# Altium PCB Disch_PCB.PcbDoc
Units mm, origin at the board's own origin, x right, y up, seen from the top; angles counter-clockwise.
Board outline 63.88 x 35.37 mm, 2 copper layers (Top Layer, Bottom Layer); 22 components, 18 nets, 78 pads, 0 vias.
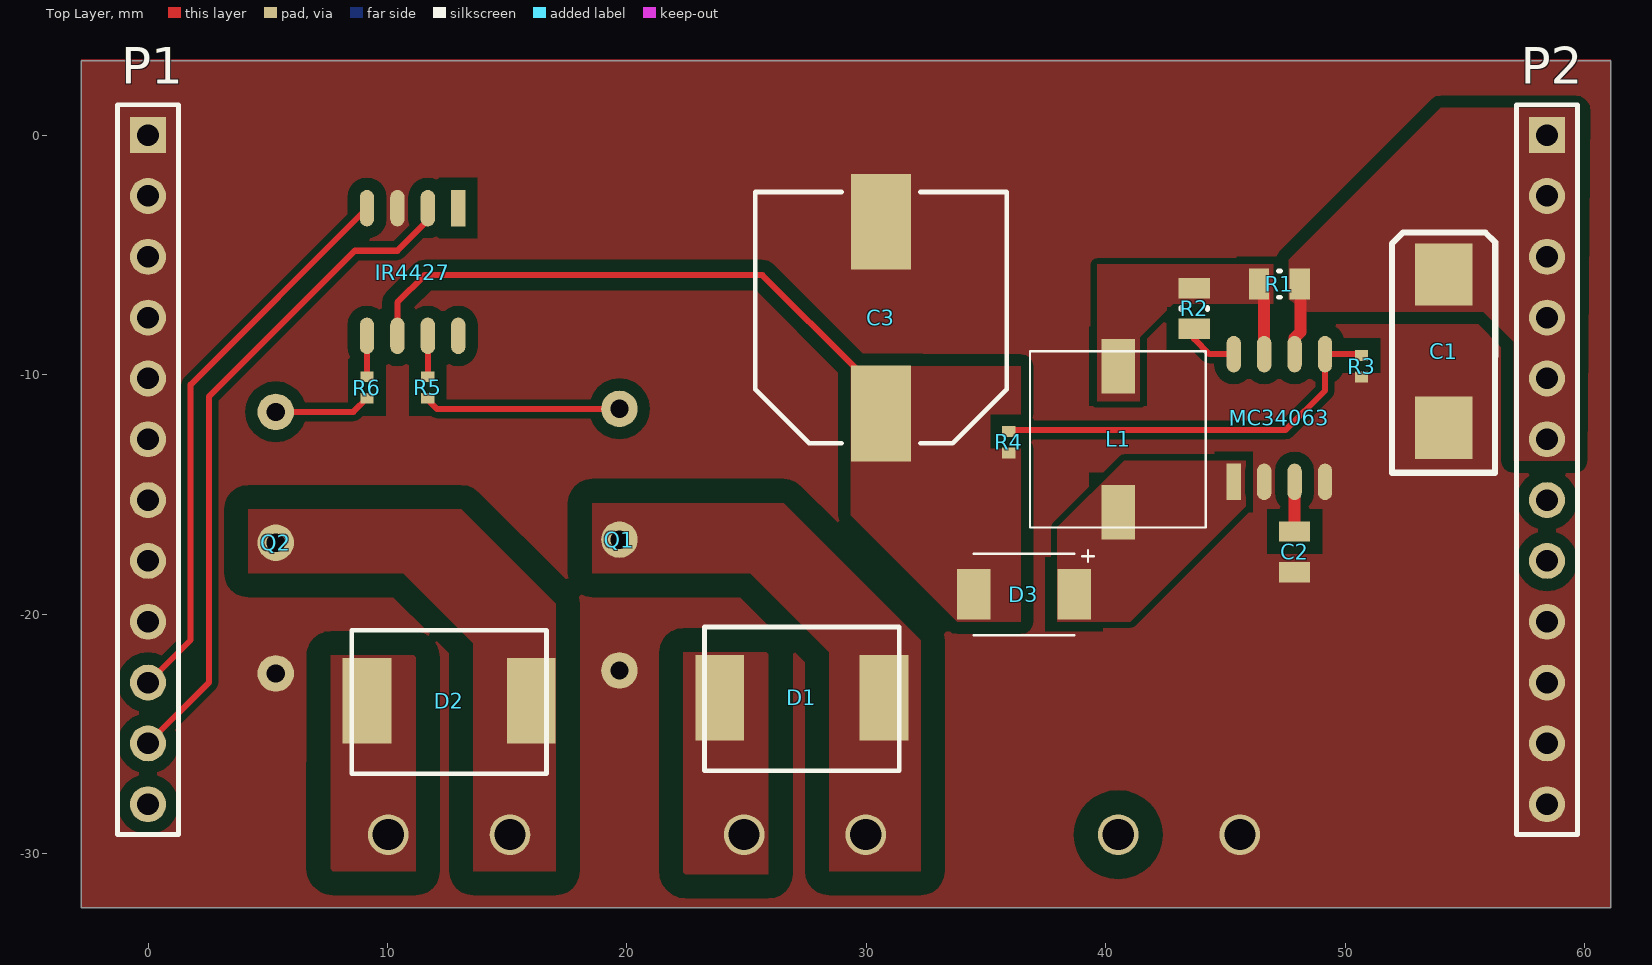
[diagram p0: Top Layer view]
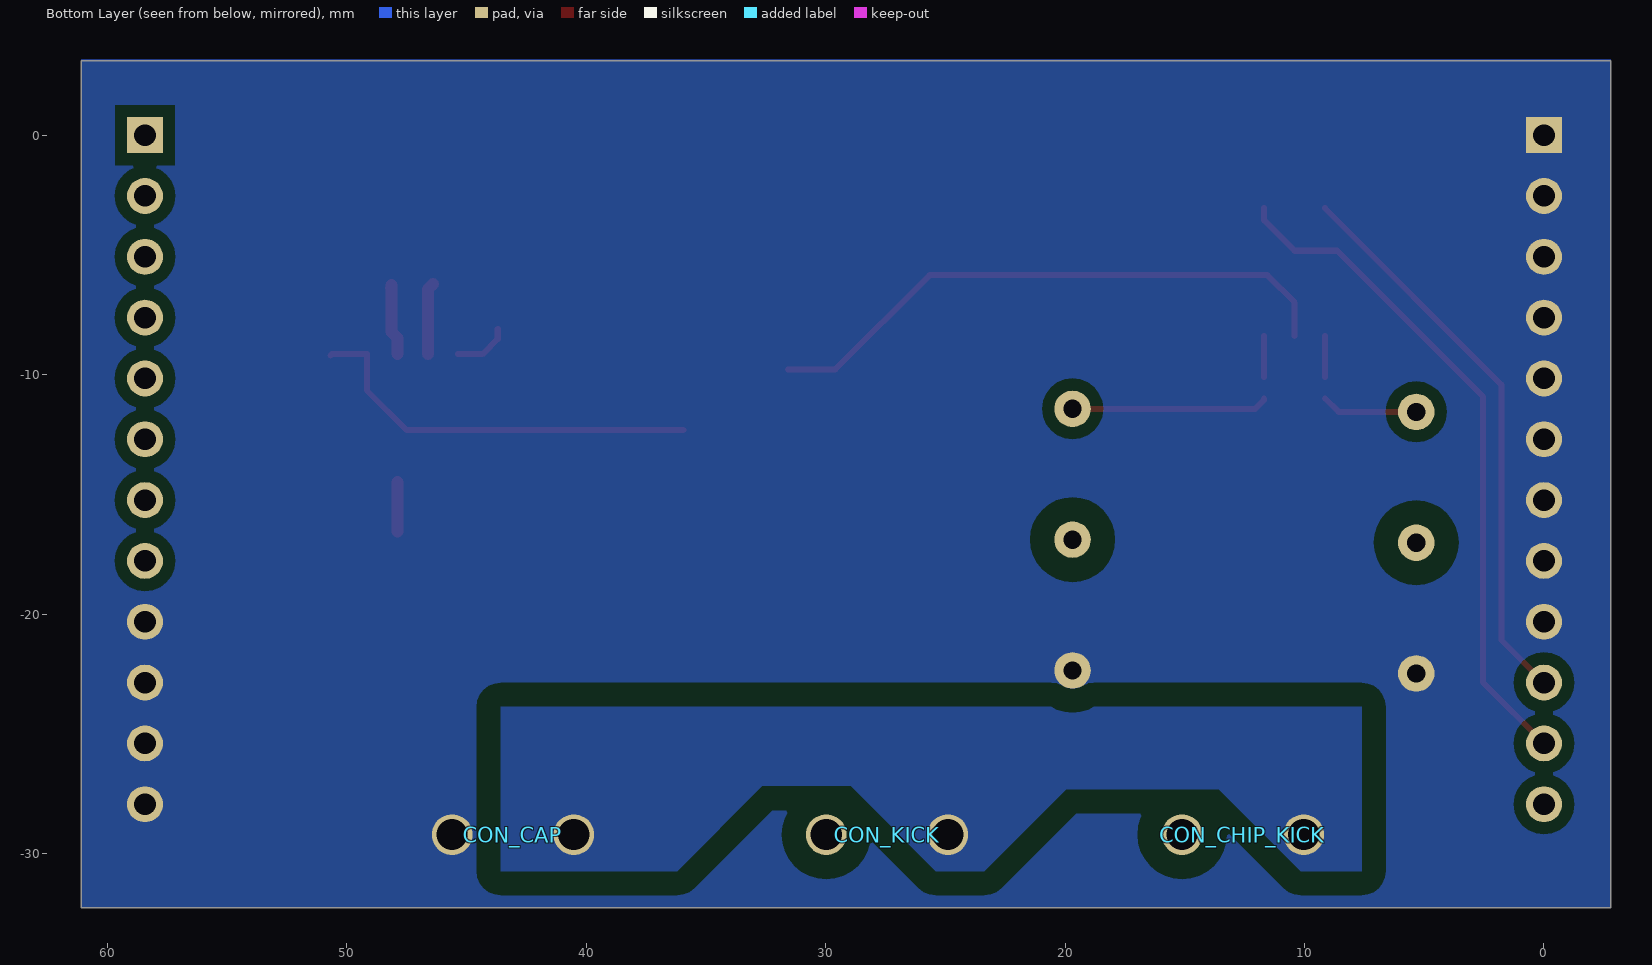
[diagram p1: Bottom Layer view, seen from below]
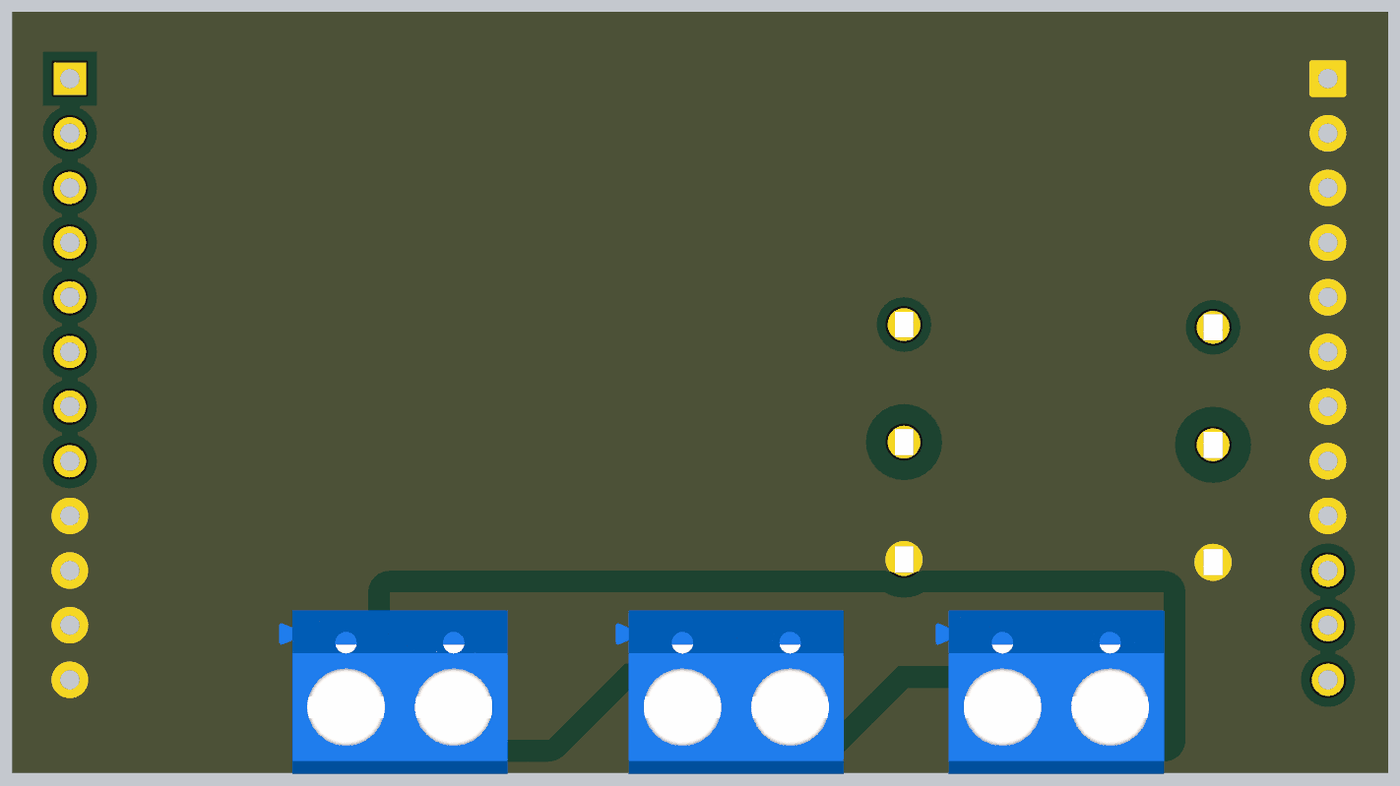
[diagram p2: 3D render of the assembled board from below, using the file's embedded part models]

## Layer stack, top to bottom
Top Solder: solder mask 0.0102, Solder Resist, Dk 3.5
Top Layer: signal copper 0.0356
Dielectric 1: dielectric 0.32, FR-4, Dk 4.8
Bottom Layer: signal copper 0.0356
Bottom Solder: solder mask 0.0102, Solder Resist, Dk 3.5

## Board outline
-2.794,-32.258 61.087,-32.258 61.087,3.107 -2.794,3.107

## Design rules (kind name [scope] priority, off if disabled: settings)
Clearance "Power Supplies" [InNetClass('PS')] p1: gap=0.5 ignorepadtopadclearanceinfootprint=TRUE
Clearance HV [InNetClass('HV')] p2: gap=1 ignorepadtopadclearanceinfootprint=TRUE
Clearance [All] p3: gap=0.254 ignorepadtopadclearanceinfootprint=TRUE except(0: Arc-Hole Track-Hole SMDPad-Hole THPad-Hole Via-Hole Fill-Hole Poly-Hole Region-Hole Text-Hole; 0.5: SMDPad-Poly THPad-Poly)
PlaneConnect [All] p1: planeconnectstyle=Direct reliefexpansion=0.508 reliefentries=4 reliefconductorwidth=0.254 reliefairgap=0.254
PolygonConnect [All] p1: connectstyle=Direct reliefconductorwidth=0.254 reliefentries=4 polygonreliefangle="90 Angle" airgapwidth=0.254
RoutingVias [All] p1: holewidth=0.711 width=1.27 viastyle="Through Hole" minholewidth=0.711 minwidth=1.27 maxholewidth=0.711 maxwidth=1.27
SolderMaskExpansion [All] p1: expansion=0.102
Width [All] p1: maxlimit=1 minlimit=0.254 preferedwidth=0.254
29 further rules are at their usual default settings.

## Classes and differential pairs
net class PS: VCC Vs
net class HV: Cap+ CHIP_KICK- KICK-

## Components (designator, comment, footprint, x,y, rotation, side; value= is the part's Value field where it differs from the comment)
C1 "100uF" 7343-CAPPOL 54.102,-9.017 r270 top
C2 "180pF" 0805-CAP 47.879,-17.399 r90 top
C3 "220uF" NIC-CAPA2-10X10_V 30.607,-7.62 r90 top
CON_CAP "OSTTA024163" "Term Block 2P" 43.053,-29.21 r180 bottom
CON_CHIP_KICK "OSTTA024163" "Term Block 2P" 12.573,-29.21 r180 bottom
CON_KICK "OSTTA024163" "Term Block 2P" 27.432,-29.21 r180 bottom
D1 "ES3J" Diode 27.305,-23.495 r0 top
D2 "ES3J" Diode 12.573,-23.622 r0 top
D3 "PMEG3050EP,115" PCBComponent 36.576,-19.177 r0 top
IR4427 "GATE DRIVER" IR4427 11.049,-5.715 r270 top
L1 "100uH" INDUCTOR 40.513,-12.7 r90 top
MC34063 "Switching Voltage Regulator" MC34063 45.339,-14.605 r90 top
P1 "Header 12" HDR1X12 0,0 r270 top
P2 "Header 12" HDR1X12 58.42,0 r270 top
Q1 "IRG4PC50FD" IRG4PC50FD 19.685,-16.891 r270 top
Q2 "IRG4PC50FD" IRG4PC50FD 5.334,-17.018 r270 top
R1 "1R" 0805-RES 47.244,-6.223 r180 top
R2 "160R" 0805-RES 43.688,-7.239 r90 top value=160
R3 "1K" 0402-RES-HD 50.673,-9.652 r90 top
R4 "11K1" 0402-RES-HD 35.941,-12.827 r90 top value=11k1
R5 "10R" 0402-RES-HD 11.684,-10.541 r270 top value=10
R6 "10R" 0402-RES-HD 9.144,-10.541 r270 top value=10

## Footprints (in the part's own frame and the unit in brackets; to place one, negate y for a bottom-side part, rotate by r counter-clockwise, add the part's x,y. Pads: shape width x height; smd on the part's side, far side on the other; paste and mask are expansions set on the pad)
0402-RES-HD [mm] "Chip Resistor, Body 1.0x0.5mm, IPC High Density"
  rect 0.45x0.55 smd: 1(-0.45,0) 2(0.45,0)
  body extent -0.52,-0.27 0.53,0.28, height 0.4
0805-CAP [mm] "Chip Resistor, Body 2.0x1.3mm, IPC High Density"
  rect 0.85x1.3 smd: 1(-0.85,0) 2(0.85,0)
  body extent -1.1,-0.67 1.1,0.68, height 0.7
0805-RES [mm] "Chip Resistor, Body 2.0x1.3mm, IPC High Density"
  rect 0.85x1.3 smd: 1(-0.85,0) 2(0.85,0)
  silkscreen extent -0.05,-0.55 0.05,0.55, body extent -1.1,-0.67 1.1,0.68, height 0.7
7343-CAPPOL [mm] "SMT Capacitor, 2 Leads, Body 7.3x4.3mm"
  rect 2.6x2.4 smd: 1(-3.202,0.007) 2(3.198,0.007)
  silkscreen extent -4.95,-2.15 5.08,2.16, body extent -3.49,-2.03 3.51,2.04, height 4.05
Diode [mil]
  rect 80x140 smd: D1+(-135,0) D1-(135,0)
  silkscreen extent -160,-120 160,116, body extent -154,-116 154,116, height 95
HDR1X12 [mm] "Connector; Header; 12 Position"
  rect 1.5x1.5 hole 0.9: 1(0,0)
  round 1.5 hole 0.9: 2(2.54,0) 3(5.08,0) 4(7.62,0) 5(10.16,0) 6(12.7,0) 7(15.24,0) 8(17.78,0) 9(20.32,0) 10(22.86,0) 11(25.4,0) 12(27.94,0)
  silkscreen extent -1.27,-1.27 29.21,1.27
INDUCTOR [mil]
  rect 90x55 smd: 1(-120,0) 2(120,0)
  silkscreen extent -145,-144 145,145, body extent -145,-139 142,149, height 180
IR4427 [mm]
  rect 1.52x0.6 smd: 1(-2.667,1.905)
  oval 1.52x0.6 smd: 2(-2.667,0.635) 3(-2.667,-0.635) 4(-2.667,-1.905) 5(2.667,-1.905) 6(2.667,-0.635) 7(2.667,0.635) 8(2.667,1.905)
  body extent -3,-2.45 3,2.45, height 1.75
IRG4PC50FD [mil] "IGBT Transistors 600V FAST 1-8 KHZ COPACK IGBT"
  round 60 hole 30: 1(0,0) 2(-215,0) 3(215,0)
  body extent -311,-94 311,115, height 1344
MC34063 [mm]
  rect 1.52x0.6 smd: 1(0.127,0)
  oval 1.52x0.6 smd: 2(0.127,-1.27) 3(0.127,-2.54) 4(0.127,-3.81) 5(5.461,-3.81) 6(5.461,-2.54) 7(5.461,-1.27) 8(5.461,0)
  body extent -0.21,-4.35 5.79,0.55, height 1.75
NIC-CAPA2-10X10_V [mm] "Aluminum Electrolytic Capacitor, Diameter 10mm, Height 10.8mm, Pitch 8mm"
  rect 4x2.5 smd: 1(-4,0) 2(4,0)
  silkscreen extent -5.25,-5.25 5.25,5.25, body extent -4.96,-4.99 5,4.99, height 10.8
PCBComponent [mm]
  rect 1.4x2.1 smd: 1(-2.1,0) 2(2.1,0)
  silkscreen extent -2.1,-1.7 2.93,1.85, body extent -2.5,-1.35 2.5,1.35, height 1.1
"Term Block 2P" [mm]
  round 1.7 hole 1.3: 1(-2.54,0) 2(2.54,0)
  body extent -5.64,-3.1 4.96,4.5, height 10

## Part data
C1: library part CT2917-100uF-1, "CAP TANT 100uF 25V 20% ESR = 30mOhm @ 100 kHz", Part No=T521X107M025ATE030
C2: library part CC0805-180pF-2, "CAP CER 180PF 50V NP0 0805", Part No=C0805C181K5GACTU, Cod EMS=05.281.019.399
C3: library part CA-220uF-1, "CAP ALUM 220uF 20% 50V  ESR = 0,18 ohms  Radial DIA 10mm HEIGH 10,2mm", Part No=EEEFK1H221P, Cod EMS=05.281.030.094
CON_CAP CON_CHIP_KICK CON_KICK: library part "Term Block 2P", "2 Position Wire to Board Terminal Block Horizontal with Board 0.200\" (5.08mm) Through Hole"
D3: library part PMEG3050EP,115-01.A.5, "DIODE SCHOTTKY 30V 5A SOD128", Cod EMS=05.284.051.031, Part No=PMEG3050EP,115
IR4427: library part IR4427, "IC DRIVER DUAL LOW SIDE 8-SOIC"
L1: library part Inductor, "Fixed Inductors 100uH 0.86A SMT"
MC34063: library part MC34063
P1 P2: "Header, 12-Pin", LatestRevisionDate=17-Jul-2002, LatestRevisionNote="Re-released for DXP Platform.", Publisher="Altium Limited"
Q1 Q2: "IGBT Transistors 600V FAST 1-8 KHZ COPACK IGBT", ComponentLink2URL=http://www.irf.com/product-info/datasheets/data/irg4pc50fd.pdf, DatasheetVersion=2000, Published=28-dez-2017, Publisher=RoboIME
R1: library part R0805-1R-1%-1, "RES SMD 1 OHM 1% 1/8W 0805", Part No=CRCW08051R00FKEA, Cod EMS=05.280.029.391
R2: library part R0805-160R-5, "RES 160 OHM 1/8W .5% 0805 SMD", Part No=ERA-6AED161V, Cod EMS=05.280.029.516, Family=ERA-6AED...V
R3: library part R0402-1K-A.9, "RES 1K OHM 1/10W 1% 0402 SMD", Part No=ERJ-2RKF1001X, Cod EMS=05.280.029.527, Family=ERJ-2RKF....X, Family Description="RESISTOR FILME ESPESSO 10R-1M / 1/10W / 1% / 0402. P/N: ERJ-2RKF....X – PANASONIC ELECTRONIC COMPONENTS."
R4: library part R0402-11K1-1, "RES 11.1 KOHM 1/16W 0.1% 0402 SMD", Part No=TNPW040211K1BEED
R5 R6: library part R0402-10R-6, "RES 10 OHM 1/10W 1% 0402 SMD", Part No=ERJ-2RKF10R0X, Cod EMS=05.280.029.523, Family=ERJ-2RKF....X, Family Description="RESISTOR FILME ESPESSO 10R-1M / 1/10W / 1% / 0402. P/N: ERJ-2RKF....X – PANASONIC ELECTRONIC COMPONENTS."

## Nets (pads, with @x,y where several pads share a name; then routed paths per layer and width w, separated by ;. In a path a pad name is that pad's centre, name@x,y a point inside that pad or via, vN(x,y) a via of type N, cw(c..) or ccw(c..) an arc to the next point about the centre after c; other vN are vias at no path point)
Cap+: CON_CAP.2 CON_CHIP_KICK.2 CON_KICK.2 D1.D1+ D2.D1+
Cap-: C1.2 C2.1 C3.2 CON_CAP.1 IR4427.3 MC34063.2 MC34063.4 P1.1 P1.2 P1.3 P1.4 P1.5 P1.6 P1.7 P1.8 P1.9 P2.9 P2.10 P2.11 P2.12 Q1.3 Q2.3 R3.1
CHARGE_ENABLE: P1.12
CHIP_KICK: Q2.2 R6.2 | length 4
  Top Layer w0.254: Q2.2 8.578,-11.557 R6.2
CHIP_KICK-: CON_CHIP_KICK.1 D2.D1- Q2.1
CHIP_KICK_SIGNAL: IR4427.4 P1.10 | length 23.6
  Top Layer w0.254: P1.10 1.778,-21.082 1.778,-10.414 IR4427.4
KICK: Q1.2 R5.2 | length 8.2
  Top Layer w0.254: R5.2 11.684,-11.049 12.065,-11.43 Q1.2
KICK-: CON_KICK.1 D1.D1- Q1.1
KICK_SIGNAL: IR4427.2 P1.11 | length 28.2
  Top Layer w0.254: P1.11 2.54,-22.86 2.54,-10.922 8.636,-4.826 10.414,-4.826 11.684,-3.556 IR4427.2
NetC2_2: C2.2 MC34063.3 | length 2.1
  Top Layer w0.5: C2.2 MC34063.3
NetD3_2: D3.2 L1.1 MC34063.1
NetIR4427_5: IR4427.5 R6.1 | length 1.7
  Top Layer w0.254: R6.1 IR4427.5
NetIR4427_7: IR4427.7 R5.1 | length 1.7
  Top Layer w0.254: R5.1 IR4427.7
NetL1_2: L1.2 MC34063.7 R1.2 R2.2 | length 3
  Top Layer w0.5: R1.2 46.609,-6.438 MC34063.7
NetMC34063_5: MC34063.5 R3.2 R4.2 | length 17
  Top Layer w0.254: R4.2@35.941,-12.319 47.498,-12.319 49.149,-10.668 MC34063.5 50.615,-9.144 R3.2
NetMC34063_8: MC34063.8 R2.1 | length 2.3
  Top Layer w0.254: R2.1 43.688,-8.509 44.323,-9.144 MC34063.8
VCC: C1.1 MC34063.6 P2.1 P2.2 P2.3 P2.4 P2.5 P2.6 R1.1 | length 3.2
  Top Layer w0.254: R1.1 48.133,-6.262 R1.1@48.26,-6.389
  Top Layer w0.5: MC34063.6 47.879,-8.467 48.133,-8.213 R1.1@48.133,-6.262
Vs: C3.1 D3.1 IR4427.6 R4.1 | length 24.6
  Top Layer w0.254: IR4427.6 10.414,-6.985 11.557,-5.842 25.654,-5.842 29.591,-9.779 C3.1@31.559,-9.779
pads on no net: IR4427.1 IR4427.8 P2.7 P2.8

## Polygon pours and split planes (outlines as drawn)
Cap- on Top Layer "GND Top" (solid, remove dead copper, pour order 20): -2.794,3.175 61.087,3.175 61.087,-32.258 -2.794,-32.258
KICK- on Top Layer "KICK-_L01_P018" (solid, remove dead copper, pour order 18): 18.542,-15.367 26.543,-15.367 32.258,-21.082 32.258,-30.734 28.448,-30.734 28.448,-21.59 25.146,-18.288 18.542,-18.288
CHIP_KICK- on Top Layer "CHIP_KICK-_L01_P016" (solid, remove dead copper, pour order 16): 4.191,-18.288 10.668,-18.288 13.589,-21.209 13.589,-30.734 17.018,-30.734 17.018,-19.558 13.081,-15.621 4.191,-15.621
Cap+ on Top Layer "CAP+_L01_P004" (solid, remove dead copper, pour order 4): 7.628,-21.722 11.176,-21.714 11.176,-30.734 7.62,-30.734
Cap+ on Top Layer "CAP+_L01_P002" (solid, remove dead copper, pour order 2): 22.36,-21.594 25.908,-21.587 25.908,-30.861 22.352,-30.861
NetD3_2 on Top Layer "NETD3_2_L01_P012" (solid, remove dead copper, pour order 12): 45.847,-13.589 40.767,-13.589 37.973,-16.383 37.973,-20.32 41.021,-20.32 45.847,-15.494
Vs on Top Layer "VS_L01_P010" (solid, remove dead copper, pour order 10): 36.449,-9.652 29.337,-9.652 29.337,-15.875 33.782,-20.32 36.449,-20.32
NetL1_2 on Top Layer "NETL1_2_L01_P006" (solid, remove dead copper, pour order 6): 39.631,-11.114 39.631,-5.399 46.997,-5.399 46.997,-7.05 42.806,-7.05 41.409,-8.447 41.409,-11.114
VCC on Top Layer "VCC Top" (solid, remove dead copper, pour order 0): 59.594,-13.589 57.023,-13.589 57.023,-8.636 55.753,-7.366 48.387,-7.366 47.625,-6.86 47.625,-5.207 53.975,1.143 59.723,1.143
Cap- on Bottom Layer "GND Bottom" (solid, remove dead copper, pour order 22): -2.794,3.175 61.087,3.175 61.087,-32.258 -2.794,-32.258
Cap+ on Bottom Layer "CAP+_L02_P008" (solid, remove dead copper, pour order 8): 7.62,-23.876 43.561,-23.876 43.561,-30.734 39.497,-30.734 36.195,-30.734 32.639,-27.178 28.956,-27.178 25.4,-30.734 23.368,-30.734 19.939,-27.305 13.589,-27.305 10.16,-30.734 7.62,-30.734